# Altium PCB Placa_Control.PcbDoc
Units mm, origin at the board's own origin, x right, y up, seen from the top; angles counter-clockwise.
Board outline 100 x 70 mm, 2 copper layers (Top Layer, Bottom Layer), stack 1.571 mm thick; 36 components, 50 nets, 226 pads, 3 vias.
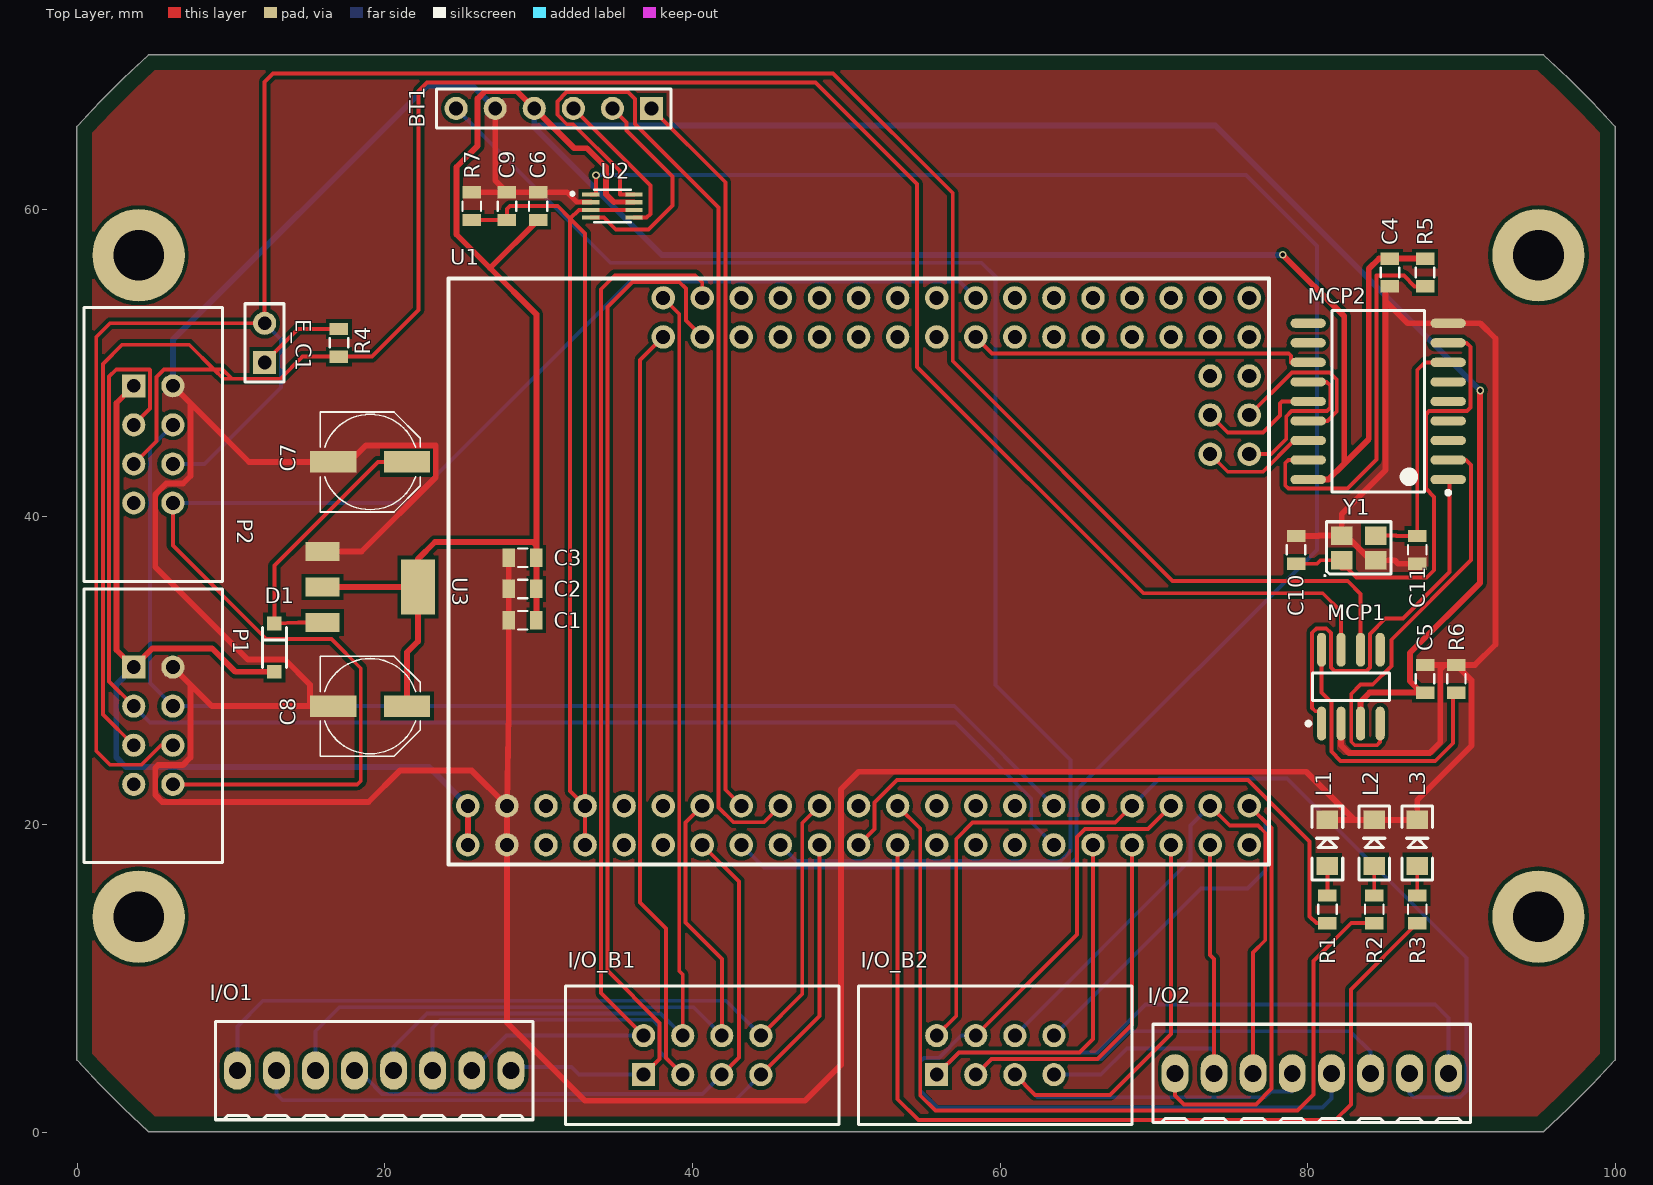
[diagram p0: Top Layer view]
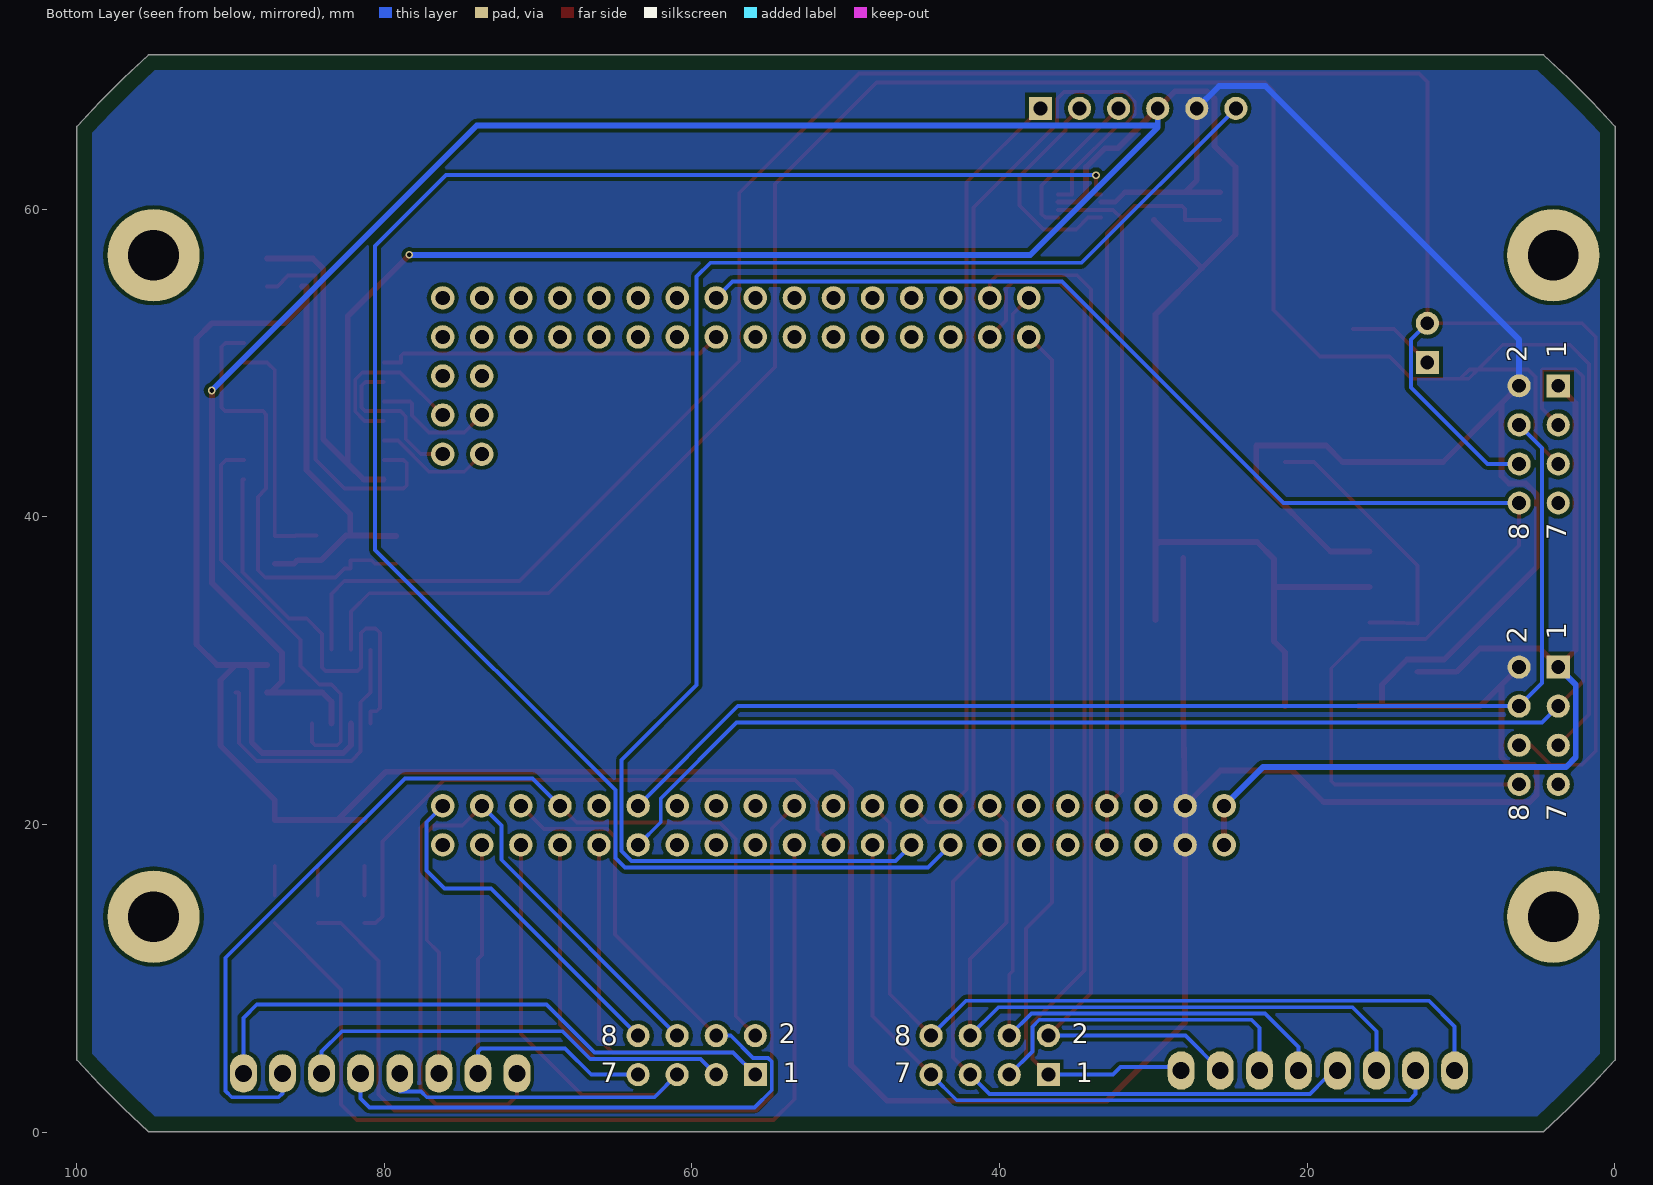
[diagram p1: Bottom Layer view, seen from below]
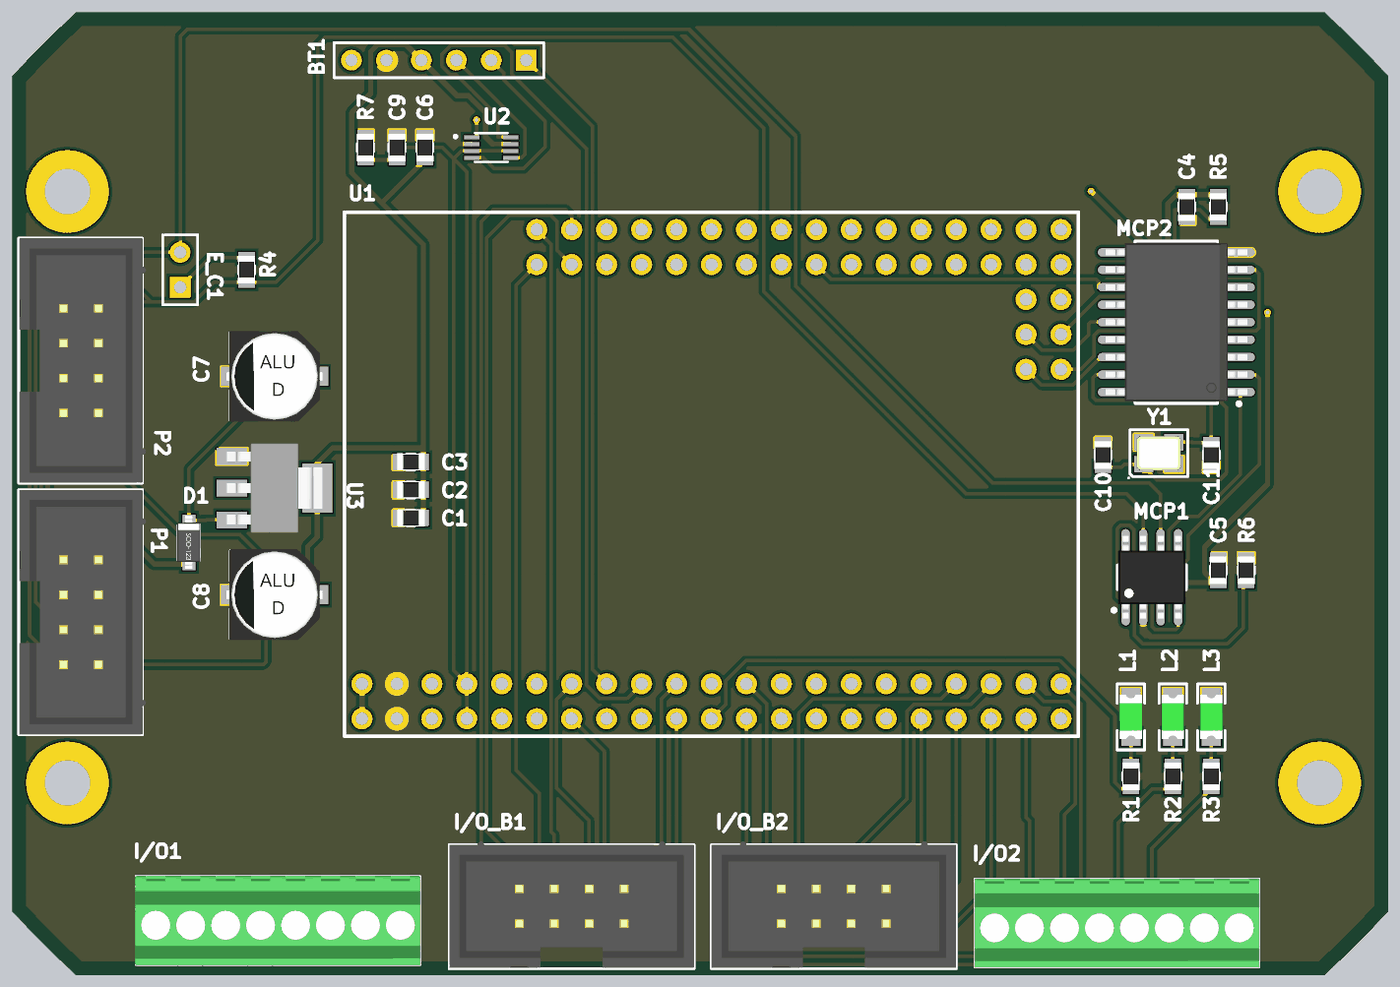
[diagram p2: 3D render of the assembled board from above, using the file's embedded part models]

## Layer stack, top to bottom
Top Solder: solder mask 0.0102, Solder Resist, Dk 3.5
Top Layer: signal copper 0.0356
Dielectric 1: dielectric 1.5, FR-4, Dk 4.8
Bottom Layer: signal copper 0.0356
Bottom Solder: solder mask 0.0102, Solder Resist, Dk 3.5

## Board outline
-0.016,49.637 -0.016,65.373 1.485,66.974 3.036,68.525 4.637,70.026 95.331,70.026 96.932,68.525 98.483,66.974 99.984,65.373 99.984,4.679 98.483,3.078 96.932,1.527 95.331,0.026 4.637,0.026 3.036,1.527 1.485,3.078 -0.016,4.679

## Design rules (kind name [scope] priority, off if disabled: settings)
BoardOutlineClearance [All] p1: gap=1 ignorepadtopadclearanceinfootprint=FALSE
Clearance Clearance_2 [InNamedPolygon('GND TOP PLANE')] p1: gap=0.254 ignorepadtopadclearanceinfootprint=FALSE except(0: Arc-Hole Track-Hole SMDPad-Hole THPad-Hole Via-Hole Fill-Hole Poly-Hole Region-Hole Text-Hole)
Clearance Clearance_1 [InNamedPolygon('GND BOTTOM PLANE')] p2: gap=0.254 ignorepadtopadclearanceinfootprint=FALSE except(0: Arc-Hole Track-Hole SMDPad-Hole THPad-Hole Via-Hole Fill-Hole Poly-Hole Region-Hole Text-Hole)
Clearance Clearance_JUMPER [InNet('GND') vs InNet('PGND')] p3: gap=0.05 ignorepadtopadclearanceinfootprint=FALSE
Clearance Clearance_POWER [InNet('24V') vs InNet('PGND')] p4: gap=0.381 ignorepadtopadclearanceinfootprint=FALSE
Clearance [All] p5: gap=0.152 ignorepadtopadclearanceinfootprint=FALSE
HoleSize [All] p1: absolutevalues=TRUE maxlimit=6.3 minlimit=0.3 maxpercent=80.000 minpercent=20.000
PlaneClearance [All] p1: clearance=5.016
PlaneConnect [All] p1: planeconnectstyle=Relief reliefexpansion=0.508 reliefentries=4 reliefconductorwidth=0.381 reliefairgap=-0.05
PolygonConnect [All] p1: connectstyle=Relief reliefconductorwidth=0.254 reliefentries=4 polygonreliefangle="90 Angle" airgapwidth=-0.05
RoutingVias RoutingVias_24V [InNet('24V')] p1: holewidth=0.5 width=0.8 viastyle="Through Hole" minholewidth=0.3 minwidth=0.6 maxholewidth=1 maxwidth=1.2
RoutingVias RoutingVias_PGND [InNet('PGND')] p2: holewidth=0.5 width=0.8 viastyle="Through Hole" minholewidth=0.3 minwidth=0.6 maxholewidth=1 maxwidth=1.2
RoutingVias RoutingVias_PGNDC [InNet('PGNDC')] p3: holewidth=0.5 width=0.8 viastyle="Through Hole" minholewidth=0.3 minwidth=0.6 maxholewidth=1 maxwidth=1.2
RoutingVias RoutingVias_MOTOR1 [InNet('MOTOR1')] p4: holewidth=0.5 width=0.8 viastyle="Through Hole" minholewidth=0.3 minwidth=0.6 maxholewidth=1 maxwidth=1.2
RoutingVias RoutingVias_MOTOR2 [InNet('MOTOR2')] p5: holewidth=0.5 width=0.8 viastyle="Through Hole" minholewidth=0.3 minwidth=0.6 maxholewidth=1 maxwidth=1.2
RoutingVias RoutingVias_C17_1 [InNet('NetC17_+')] p6: holewidth=0.5 width=0.8 viastyle="Through Hole" minholewidth=0.3 minwidth=0.6 maxholewidth=1 maxwidth=1.2
RoutingVias [All] p7: holewidth=0.3 width=0.5 viastyle="Through Hole" minholewidth=0.3 minwidth=0.6 maxholewidth=1 maxwidth=1.2
SMDNeckDown [All] p1: percent=120.000
SilkToSilkClearance [All] p1 off: silktosilkclearance=0.127
SolderMaskExpansion [All] p1: expansion=0.102
Width Width_Motor1 [InNet('MOTOR1')] p1: maxlimit=0.889 minlimit=0.7 preferedwidth=0.8
Width Width_Motor2 [InNet('MOTOR2')] p2: maxlimit=0.889 minlimit=0.7 preferedwidth=0.8
Width Width_24V [InNet('24V')] p3: maxlimit=0.889 minlimit=0.7 preferedwidth=0.8
Width Width_PGND [InNet('PGND')] p4: maxlimit=0.889 minlimit=0.6 preferedwidth=0.8
Width Width_PGNDC [InNet('PGNDC')] p5: maxlimit=0.889 minlimit=0.6 preferedwidth=0.8
Width Width_GND [InNet('GND')] p6: maxlimit=0.508 minlimit=0.254 preferedwidth=0.381 checkconnectedcopper=TRUE
Width Width_Vin [InNet('Vin')] p7: maxlimit=0.508 minlimit=0.254 preferedwidth=0.381 checkconnectedcopper=TRUE
Width Width_C17_1 [InNet('NetC17_+')] p8: maxlimit=0.508 minlimit=0.254 preferedwidth=0.381 checkconnectedcopper=TRUE
Width Width_5V [InNet('5V')] p9: maxlimit=0.381 minlimit=0.254 preferedwidth=0.381 checkconnectedcopper=TRUE
Width [All] p10: maxlimit=0.508 minlimit=0.254 preferedwidth=0.254
26 further rules are at their usual default settings.

## Components (designator, comment, footprint, x,y, rotation, side; value= is the part's Value field where it differs from the comment)
BT1 "Header 6" HDR1X6 37.338,66.548 r180 top
C1 "100n" 0805 28.956,33.274 r180 top
C2 "100n" 0805 28.956,35.306 r180 top
C3 "100n" 0805 28.956,37.338 r180 top
C4 "100n" 0805 85.344,55.88 r270 top
C5 "100n" 0805 87.63,29.464 r90 top
C6 "100n" 0805 29.972,60.198 r90 top
C7 "47u" PANASONIC_D 19.05,43.561 r0 top
C8 "47u" PANASONIC_D 19.05,27.686 r0 top
C9 "100n" 0805 27.94,60.198 r90 top
C10 "22p" 0805 79.248,37.846 r90 top
C11 "22p" 0805 87.122,37.846 r270 top
D1 "SOD123-1A" SOD-123 12.827,31.496 r270 top
E_C1 "Header 2" HDR1X2 12.192,50.038 r90 top
I/O1 "282834-8" "TE 282834-8" 19.304,4 r180 top
I/O2 "282834-8" "TE 282834-8" 80.264,3.81 r180 top
I/O_B1 "IDC2X4" IDC2X4 40.64,5 r0 top
I/O_B2 "IDC2X4" IDC2X4 59.69,5 r0 top
L1 "1206 LED" LED-1206 81.28,18.796 r90 top
L2 "1206 LED" LED-1206 84.328,18.796 r90 top
L3 "1206 LED" LED-1206 87.122,18.796 r90 top
MCP1 "MCP2551T-I/SN" SOIC-SN8_N 82.804,28.956 r90 top
MCP2 "MCP2515T-E/SO" SOIC-SO18_N 84.582,47.498 r180 top
P1 "IDC2X4" IDC2X4 4.953,26.416 r270 top
P2 "IDC2X4" IDC2X4 4.953,44.704 r270 top
R1 "560" 0805 81.28,14.478 r270 top
R2 "560" 0805 84.328,14.478 r270 top
R3 "560" 0805 87.122,14.478 r270 top
R4 "124" 0805 17.018,51.308 r90 top
R5 "10K" 0805 87.63,55.88 r90 top
R6 "4.7K" 0805 89.662,29.464 r270 top
R7 "10K" 0805 25.654,60.198 r270 top
U1 "RobotDyn Mega 2560 Pro" Mega2560Pro_Layout 24.13,17.272 r0 top
U2 "TXB0102" SOP50P310X90-8N 34.798,60.198 r0 top
U3 "NCP1117" SOT223 19.05,35.433 r270 top
Y1 "16MHz" "NDK NX3225SA" 83.312,37.973 r0 top

## Footprints (in the part's own frame and the unit in brackets; to place one, negate y for a bottom-side part, rotate by r counter-clockwise, add the part's x,y. Pads: shape width x height; smd on the part's side, far side on the other; paste and mask are expansions set on the pad)
0805 [mil]
  rect 31.5x47.24 smd: 1(-35.43,0) 2(35.43,0)
  silkscreen extent -12,-24 12,24, body extent -39,-25 39,25, height 20
HDR1X2 [mm] "Connector; Header; 2 Position"
  rect 1.5x1.5 hole 0.9: 1(0,0)
  round 1.5 hole 0.9: 2(2.54,0)
  silkscreen extent -1.27,-1.27 3.81,1.27
HDR1X6 [mm] "Connector; Header; 6 Position"
  rect 1.5x1.5 hole 0.9: 1(0,0)
  round 1.5 hole 0.9: 2(2.54,0) 3(5.08,0) 4(7.62,0) 5(10.16,0) 6(12.7,0)
  silkscreen extent -1.27,-1.27 13.97,1.27
IDC2X4 [mm] "IDC Connector 2x4"
  rect 1.5x1.5 hole 0.9: 1(-3.81,-1.27)
  round 1.5 hole 0.9: 2(-3.81,1.27) 3(-1.27,-1.27) 4(-1.27,1.27) 5(1.27,-1.27) 6(1.27,1.27) 7(3.81,-1.27) 8(3.81,1.27)
  silkscreen extent -8.9,-4.5 8.9,4.5, body extent -8.89,-4.44 8.89,4.76, height 9.01
LED-1206 [mm]
  rect 1.2x1.4 smd: A(-1.5,0) C(1.5,0)
  silkscreen extent -2.4,-1 2.4,1, body extent -1.6,-0.8 1.6,0.8, height 1.11
Mega2560Pro_Layout [mil]
  round 60 hole 36: 0(550,155) 1(550,55) 2(650,155) 3(650,55) 3V3@0(350,155) 3V3@1(350,55) 4(750,155) 5(750,55) 5V@0(250,155) 5V@1(250,55) 6(850,155) 7(850,55) 8(950,155) 9(950,55) 10(1050,155) 11(1050,55) 12(1150,155) 13(1150,55) 14(1250,155) 15(1250,55) 16(1350,155) 17(1350,55) 18(1450,155) 19(1450,55) 20(1550,155) 21(1550,55) 22(1650,155) 23(1650,55) 24(1750,155) 25(1750,55) 26(1850,155) 27(1850,55) 28(1950,155) 29(1950,55) 30(2050,155) 31(2050,55) 32(1350,1455) 33(1350,1355) 34(1450,1455) 35(1450,1355) 36(1550,1455) 37(1550,1355) 38(1650,1455) 39(1650,1355) 40(1750,1455) 41(1750,1355) 42(1850,1455) 43(1850,1355) 44(1950,1455) 45(1950,1355) 46(2050,1455) 47(2050,1355) 48(2050,1255) 49(1950,1255) 50(2050,1155) 51(1950,1155) 52(2050,1055) 53(1950,1055) A0(550,1455) A1(550,1355) A2(650,1455) A3(650,1355) A4(750,1455) A5(750,1355) A6(850,1455) A7(850,1355) A8(950,1455) A9(950,1355) A10(1050,1455) A11(1050,1355) A12(1150,1455) A13(1150,1355) A14(1250,1455) A15(1250,1355) AREF(450,155) GND@0(150,155) GND@1(150,55) RESET(450,55) VIN@0(50,155) VIN@1(50,55)
  silkscreen extent 0,5 2100,1505
"NDK NX3225SA" [mm] "Crystal, 4-Leads, Body 2.50x3.20mm, Pitch 2.20mm, IPC Medium Density"
  rect 1.4x1.2 smd: 1(-1.1,-0.8) 2(1.1,-0.8) 3(1.1,0.8) 4(-1.1,0.8)
  silkscreen extent -2.25,-1.85 2.1,1.7, body extent -1.61,-1.26 1.61,1.26, height 0.6
PANASONIC_D [mm]
  rect 3x1.4 smd: +(2.4,0) -(-2.4,0)
  silkscreen extent -3.25,-3.25 3.25,3.25, body extent -3.5,-3.3 3.5,3.3, height 5.4
SOD-123 [mm]
  rect 0.9x0.95 smd: A(1.575,0) C(-1.575,0)
  silkscreen extent -1.3,-0.77 1.3,0.77, body extent -1.93,-0.86 1.92,0.84, height 1.46
SOIC-SN8_N [mm] "SOIC, 8-Leads, Body 4.9x3.8mm, Pitch 1.27mm, IPC Medium Density"
  oval 2.2x0.6 smd: 1(-2.4,1.905) 2(-2.4,0.635) 3(-2.4,-0.635) 4(-2.4,-1.905) 5(2.4,-1.905) 6(2.4,-0.635) 7(2.4,0.635) 8(2.4,1.905)
  silkscreen extent -2.52,-2.5 0.9,2.88, body extent -3,-2.45 3,2.45, height 1.75
SOIC-SO18_N [mm] "SOIC, 18-Leads, Body 11.5x7.5mm, Pitch 1.27mm, IPC Medium Density"
  oval 2.3x0.6 smd: 1(-4.55,5.08) 2(-4.55,3.81) 3(-4.55,2.54) 4(-4.55,1.27) 5(-4.55,0) 6(-4.55,-1.27) 7(-4.55,-2.54) 8(-4.55,-3.81) 9(-4.55,-5.08) 10(4.55,-5.08) 11(4.55,-3.81) 12(4.55,-2.54) 13(4.55,-1.27) 14(4.55,0) 15(4.55,1.27) 16(4.55,2.54) 17(4.55,3.81) 18(4.55,5.08)
  silkscreen extent -4.67,-5.9 3,6.05, body extent -5.15,-5.77 5.15,5.76, height 2.65
SOP50P310X90-8N [mm]
  rect 1.12x0.27 smd: 1(-1.405,0.75) 2(-1.405,0.25) 3(-1.405,-0.25) 4(-1.405,-0.75) 5(1.405,-0.75) 6(1.405,-0.25) 7(1.405,0.25) 8(1.405,0.75)
  silkscreen extent -2.7,-1.05 1.2,1.05
SOT223 [mil]
  rect 48x88 smd: 1(-91,-122) 2(0,-122) 3(91,-122)
  rect 141.73x86.61 smd: 4(0,122.01)
  body extent -128,-136 128,136, height 63
"TE 282834-8" [mm]
  oval 1.75x2.5 hole 1.1: 1(-8.89,0) 2(-6.35,0) 3(-3.81,0) 4(-1.27,0) 5(1.27,0) 6(3.81,0) 7(6.35,0) 8(8.89,0)
  silkscreen extent -10.32,-3.2 10.32,3.2, body extent -10.39,-3.25 10.39,3.25, height 10

## Part data
BT1: "Header, 6-Pin", LatestRevisionDate=17-Jul-2002, LatestRevisionNote="Re-released for DXP Platform.", Publisher="Altium Limited"
C1 C2 C3 C4 C5 C6 C9 C10 C11: library part CAP0805
C7 C8: library part 47UF-50V-20%(ELECT), PROD_ID=CAP-10547
D1: library part DIODESOD123
E_C1: "Header, 2-Pin", LatestRevisionDate=17-Jul-2002, LatestRevisionNote="Re-released for DXP Platform.", Publisher="Altium Limited"
I/O1 I/O2: "TERM BLOCK 8POS SIDE ENT 2.54MM", Colour=Green, Manufacturer="TE Connectivity AMP Connectors", Supplier Part Number 1=A98338-ND, TemperatureRange="-40C ~ 105C", Voltage=150V, ComponentLink1Description=Datasheet, ComponentLink1URL=http://www.te.com/commerce/DocumentDelivery/DDEController?Action=srchrtrv&DocNm=282834&DocType=Customer+Drawing&DocLang=English, ComponentLink2Description="Digi-Key Listing", ComponentLink2URL=http://www.digikey.ca/product-detail/en/282834-8/A98338-ND/1150136, Number Of Levels=1, Orientation="Horizontal with Board", PartId=9295, Part Number=282834-8, Pitch="0.100\" (2.54mm)", Positions Per Level=8, Price=8,41, Supplier 1=Digi-Key
I/O_B1 I/O_B2 P1 P2: "Header, 4-Pin, Dual row", LatestRevisionDate=17-Jul-2002, LatestRevisionNote="Re-released for DXP Platform.", Publisher="Altium Limited"
L1 L2 L3: library part LED1206
MCP1: "High-Speed CAN Transceiver, 8-Pin SOIC, Industrial Temperature, Tape and Reel", Supplier Part Number 1=MCP2551T-I/SNTR-ND, Code_IPC=SOIC127P600-8, Code_JEDEC=MS-012, ComponentLink1Description=Datasheet, ComponentLink1URL=http://ww1.microchip.com/downloads/en/DeviceDoc/21667E.pdf, ComponentLink2Description="Packaging Specification", ComponentLink2URL=http://www.microchip.com/stellent/groups/techpub_sg/documents/packagingspec/en012702.pdf, ComponentLink3Description="Microchip.com Home", ComponentLink3URL=http://www.microchip.com/, DatasheetVersion="revE, Jan-2007", PackageDescription="8-Lead Plastic Small Outline (SN) - Narrow, 3.90mm Body [SOIC]", PackageReference=SOIC-SN8, PackageVersion="revBB, Aug-2009", Published=29-Jan-2009, Publisher="Altium Limited", Supplier 1=Digi-Key, Supplier 2=Farnell, Supplier Part Number 2=1788569
MCP2: "Stand-Alone CAN Controller With SPI Interface, 18-Pin SOIC, Extended Temperature, Tape and Reel", Supplier Part Number 1=MCP2515T-E/SO-ND, Code_JEDEC=MS-013, ComponentLink1Description=Datasheet, ComponentLink1URL=http://ww1.microchip.com/downloads/en/DeviceDoc/21801e.pdf, ComponentLink2Description="Packaging Specification", ComponentLink2URL=http://www.microchip.com/stellent/groups/techpub_sg/documents/packagingspec/en012702.pdf, ComponentLink3Description="Microchip.com Home", ComponentLink3URL=http://www.microchip.com/, DatasheetVersion="revE, Nov-2007", PackageDescription="18-Lead Plastic Small Outline (SO) - Wide 7.50mm Body [SOIC]", PackageReference=SOIC-SO18, PackageVersion="revBB, Aug-2009", Published=29-Jan-2009, Publisher="Altium Limited", Supplier 1=Digi-Key
R1 R2 R3 R4 R5 R6 R7: library part RESISTOR0805-RES
U1: BOM_Manufacturer Part=?, spicePre=U
U2: "2-Bit Bidirectional Voltage-Level Translator with Auto Direction Sensing and +/-15-kV ESD Protect", Package=None, Availability=Unavailable, MF="Texas Instruments", MP=TXB0102, Price=None, SnapEDA_Link=https://www.snapeda.com/parts/TXB0102/Texas%20Instruments/view-part/?ref=snap
U3: library part V_REG_LM1117SOT223, PROD_ID=VREG-08170
Y1: library part NX3225SA-16.000MHZ-STD-CSR-1, "CRYSTAL 16.0000MHZ 8PF SMD", Device Package="4-SMD, No Lead (DFN, LCC)", Frequency Stability=15ppm, Load Capacitance=8pF, Manufacturer=NDK, Operating Mode=Fundamental, Supplier Part Number 1=644-1049-2-ND, ComponentLink1Description=Datasheet, ComponentLink1URL=http://media.digikey.com/pdf/Data%20Sheets/NDK%20PDFs/NX3225SA.pdf, ComponentLink2Description="Digi-Key Listing", ComponentLink2URL=http://www.digikey.com/product-detail/en/NX3225SA-16.000MHZ-STD-CSR-1/644-1049-2-ND/1128831, ESR="80 Ohm", Frequency=16MHz, Frequency Tolerance=15ppm, PartId=8509, Part Number=NX3225SA-16.000MHZ-STD-CSR-1, Price=0,3799, Supplier 1=Digi-Key, Type="MHz Crystal"

## Free pads (board coordinates)
  round 6 hole 3.3: 7(4,14) 8(95,14) 9(4,57) 10(95,57)

## Via types
v1: diameter 0.5, hole 0.3, Top Layer to Bottom Layer, 3 vias

## Nets (pads, with @x,y where several pads share a name; then routed paths per layer and width w, separated by ;. In a path a pad name is that pad's centre, name@x,y a point inside that pad or via, vN(x,y) a via of type N, cw(c..) or ccw(c..) an arc to the next point about the centre after c; other vN are vias at no path point)
3.3V: C9.1 R7.2 U1.3V3@0 U1.3V3@1 U2.3 U2.6 | length 91.6
  Top Layer w0.254: R7.2 C9.1 27.94,59.995 28.143,60.198 31.242,60.198 32.054,59.386 ; 33.02,18.669 33.02,21.209 ; U2.6 U2.3 32.614,59.948 32.054,59.389 32.054,59.386 ; 32.054,59.386 32.054,22.175 33.02,21.209 ; 32.054,59.386 33.02,58.42 33.02,21.209
5V: BT1.4 C1.1 C2.1 C3.1 C4.1 C5.1 C6.1 C8.+ MCP1.3 MCP2.18 R5.2 U2.7 U3.2 U3.4 | length 264.7
  Top Layer w0.324: 34.9,60.448 U2.7
  Top Layer w0.381: U3.2 U3.4 ; C8.+ 21.45,31.191 22.149,31.89 U3.4 ; C1.1 C2.1 C3.1 29.856,38.151 ; C6.1 26.846,56.172 ; 34.9,60.448 34.378,60.97 34.378,62.727 33.147,63.957 32.309,63.957 BT1.4 28.6,67.666 26.518,67.666 26.035,67.183 26.035,64.11 24.663,62.738 24.663,58.355 26.846,56.172 ; v1(78.384,57.023) 82.372,53.035 82.372,43.447 ; MCP2.18 81.343,42.418 82.372,43.447 ; MCP1.3 83.439,27.991 84.012,28.564 C5.1@87.401,28.564 ; C5.1 C5.1@87.401,28.564 ; R5.2 C4.1 84.633,56.78 83.972,56.12 83.972,45.048 82.372,43.447 ; v1(91.211,48.209) 91.211,35.712 86.639,31.14 86.639,29.326 C5.1@87.401,28.564 ; U3.4 22.149,37.237 23.266,38.354 29.653,38.354 29.856,38.151 ; 26.846,56.172 29.856,53.162 29.856,38.151
  Bottom Layer w0.381: BT1.4 29.718,65.43 ; v1(78.384,57.023) 38.007,57.023 29.718,65.312 29.718,65.43 ; v1(91.211,48.209) 73.99,65.43 29.718,65.43
Aux_1: I/O1.1 I/O_B1.1 U1.A3 | length 70.4
  Top Layer w0.254: I/O_B1.1 37.859,4.759 37.859,7.099 34.468,10.49 34.468,53.645 36.093,55.27 39.141,55.27 39.573,54.839 39.573,52.756 U1.A3
  Bottom Layer w0.254: I/O1.1 28.194,4.219 32.141,4.219 32.63,3.73 I/O_B1.1
Aux_2: I/O1.2 I/O_B1.2 U1.A2 | length 69.9
  Top Layer w0.254: I/O_B1.2 34.061,9.039 34.061,54.787 34.976,55.702 40.157,55.702 40.64,55.22 U1.A2
  Bottom Layer w0.254: I/O1.2 27.924,6.27 I/O_B1.2
Aux_3: I/O1.3 I/O_B1.3 U1.A1 | length 71.4
  Top Layer w0.254: U1.A1 36.601,50.19 36.601,14.91 38.278,13.233 38.278,4.822 I/O_B1.3
  Bottom Layer w0.254: I/O1.3 23.114,6.782 23.631,7.299 37.418,7.299 37.871,6.846 37.871,5.229 I/O_B1.3
Aux_4: I/O1.4 I/O_B1.4 U1.A0 | length 70.3
  Top Layer w0.254: U1.A0 39.141,53.188 39.141,10.465 39.37,10.236 I/O_B1.4
  Bottom Layer w0.254: I/O1.4 20.574,5.537 22.742,7.705 37.935,7.705 I/O_B1.4
Aux_5: I/O1.5 I/O_B1.5 U1.3 | length 41.7
  Top Layer w0.254: U1.3 43.028,16.281 43.028,4.848 I/O_B1.5
  Bottom Layer w0.254: I/O1.5 18.034,3.505 18.796,3.505 19.83,2.471 40.651,2.471 I/O_B1.5
Aux_6: I/O1.6 I/O_B1.6 U1.2 | length 46.7
  Top Layer w0.254: U1.2 39.548,20.117 39.548,13.614 41.91,11.252 I/O_B1.6
  Bottom Layer w0.254: I/O1.6 15.494,6.553 17.052,8.111 40.069,8.111 I/O_B1.6
Aux_7: I/O1.7 I/O_B1.7 U1.9 | length 50.4
  Top Layer w0.254: I/O_B1.7 48.26,7.54 U1.9
  Bottom Layer w0.254: I/O1.7 12.954,2.464 13.353,2.065 42.785,2.065 I/O_B1.7
Aux_8: I/O1.8 I/O_B1.8 U1.8 | length 55
  Top Layer w0.254: I/O_B1.8 47.142,8.962 47.142,20.091 U1.8
  Bottom Layer w0.254: I/O1.8 10.414,6.858 12.09,8.534 42.186,8.534 I/O_B1.8
Aux_9: I/O2.1 I/O_B2.1 U1.23 | length 62.9
  Top Layer w0.254: I/O_B2.1 57.332,5.182 65.176,5.182 66.04,6.045 U1.23
  Bottom Layer w0.254: I/O_B2.1 57.332,5.182 66.345,5.182 69.444,8.28 88.29,8.28 89.154,7.417 I/O2.1
Aux_10: I/O2.2 I/O_B2.2 U1.24 | length 66.9
  Top Layer w0.254: I/O_B2.2 57.15,7.54 57.15,19.05 58.216,20.116 67.487,20.116 U1.24
  Bottom Layer w0.254: U1.24 70.358,22.987 78.664,22.987 90.322,11.328 90.322,2.667 89.916,2.261 86.868,2.261 86.614,2.515 I/O2.2
Aux_11: I/O2.3 I/O_B2.3 U1.25 | length 52
  Top Layer w0.254: I/O_B2.3 59.449,4.759 66.345,4.759 68.58,6.994 U1.25
  Bottom Layer w0.254: I/O_B2.3 59.449,4.759 66.608,4.759 68.402,6.553 82.753,6.553 84.074,5.232 I/O2.3
Aux_12: I/O2.4 I/O_B2.4 U1.26 | length 57.8
  Top Layer w0.254: I/O_B2.4 64.999,12.849 64.999,19.177 65.532,19.71 69.621,19.71 U1.26
  Bottom Layer w0.254: I/O_B2.4 57.476,6.27 56.032,4.826 55.042,4.826 54.813,4.597 54.813,2.718 55.931,1.6 80.95,1.6 81.534,2.184 I/O2.4
Aux_13: I/O2.5 I/O_B2.5 U1.27 | length 44.6
  Top Layer w0.254: I/O_B2.5 62.277,2.413 67.158,2.413 71.12,6.375 U1.27
  Bottom Layer w0.254: I/O_B2.5 62.429,2.261 77.241,2.261 77.622,2.642 78.994,2.642 I/O2.5
Aux_14: I/O2.6 I/O_B2.6 U1.28 | length 40.5
  Top Layer w0.254: U1.28 74.93,19.939 76.759,19.939 77.241,19.456 77.241,12.471 76.454,11.684 I/O2.6
  Bottom Layer w0.254: I/O_B2.6 72.39,17.7 72.39,19.939 U1.28
Aux_15: I/O2.7 I/O_B2.7 U1.29 | length 27.6
  Top Layer w0.254: U1.29 73.66,11.506 73.914,11.252 I/O2.7
  Bottom Layer w0.254: I/O_B2.7 66.548,3.73 68.254,5.436 73.711,5.436 73.914,5.232 I/O2.7
Aux_16: I/O2.8 I/O_B2.8 U1.30 | length 50.2
  Top Layer w0.254: I/O2.8 71.374,2.388 71.958,1.803 76.632,1.803 77.648,2.819 77.648,19.761 U1.30
  Bottom Layer w0.254: I/O_B2.8 73.054,15.824 76.098,15.824 77.267,16.993 77.267,20.142 U1.30
BT_EN: BT1.6 U1.7 | length 98.5
  Bottom Layer w0.254: BT1.6 34.671,56.515 58.801,56.515 59.69,55.626 59.69,29.058 64.567,24.181 64.567,18.263 63.932,17.628 46.761,17.628 U1.7
BT_RX_3.3: BT1.2 U2.4 | length 14.2
  Top Layer w0.254: U2.4 34.239,59.448 35.013,58.674 37.144,58.674 38.71,60.24 38.71,62.12 35.717,65.113 35.717,65.629 BT1.2
BT_RX_5: U1.5 U2.1 | length 119.3
  Top Layer w0.254: U2.1 33.731,60.948 v1(33.731,62.205)
  Bottom Layer w0.254: v1(33.731,62.205) 75.997,62.205 80.594,57.607 80.594,37.846 64.973,22.225 64.973,17.805 64.364,17.196 44.653,17.196 U1.5
BT_STATE: BT1.1 U1.4 | length 47.8
  Top Layer w0.254: BT1.1 42.139,61.747 42.139,22.25 U1.4
BT_TX_3.3: BT1.3 U2.5 | length 10.1
  Top Layer w0.254: BT1.3 37.262,61.544 37.262,59.69 37.02,59.448 U2.5
BT_TX_5: U1.6 U2.8 | length 67.6
  Top Layer w0.254: U2.8 35.281,60.948 35.281,62.488 32.249,65.519 31.832,65.519 31.217,66.134 31.217,67.005 31.826,67.615 35.814,67.615 36.271,67.158 36.271,65.544 41.707,60.109 41.707,21.107 42.672,20.142 44.653,20.142 U1.6
C_CS: MCP2.16 U1.53 | length 7.7
  Top Layer w0.254: U1.53 74.803,42.926 77.089,42.926 79.121,44.958 MCP2.16
CANH: MCP1.7 P1.5 P2.5 R4.1 | length 159.2
  Top Layer w0.254: P1.5 1.676,27.153 1.676,49.936 2.921,51.181 7.29,51.181 8.89,49.581 ; P2.5 5.156,44.907 5.156,49.098 5.639,49.581 8.89,49.581 ; MCP1.7 82.169,33.833 80.975,35.027 69.317,35.027 54.61,49.733 54.61,61.62 48.006,68.224 22.733,68.224 22.2,67.691 22.2,53.442 19.166,50.408 R4.1 14.645,50.408 13.208,48.971 10.058,48.971 ; 8.89,49.581 9.5,48.971 10.058,48.971 ; 8.89,49.581 9.449,49.581 10.058,48.971
CANL: E_C1.2 MCP1.6 P1.6 P2.6 | length 169
  Top Layer w0.254: P1.6 5.461,25.146 4.191,23.876 2.134,23.876 1.245,24.765 1.245,51.689 2.134,52.578 E_C1.2 12.192,68.275 12.725,68.809 49.149,68.809 56.921,61.036 56.921,50.114 71.222,35.814 82.601,35.814 83.439,34.976 MCP1.6
  Bottom Layer w0.254: P2.6 8.28,43.434 13.259,48.412 13.259,51.511 E_C1.2
CTAL1: C10.1 MCP2.8 Y1.1 | length 29
  Top Layer w0.254: C10.1 80.594,36.946 80.821,37.173 Y1.1@82.194,37.173 ; Y1.1 Y1.1@82.194,37.173 ; MCP2.8 90.322,51.308 90.576,51.054 90.576,47.092 90.348,46.863 87.884,46.863 87.681,46.66 87.681,41.834 88.222,41.292 88.222,36.525 87.74,36.043 83.16,36.043 82.575,36.627 82.194,36.627 Y1.1@82.194,37.173
CTAL2: C11.1 MCP2.7 Y1.3 | length 15.7
  Top Layer w0.254: Y1.3 85.75,38.773 85.777,38.746 C11.1 87.122,49.53 87.63,50.038 MCP2.7
GND: BT1.5 C1.2 C2.2 C3.2 C4.2 C5.2 C6.2 C7.- C8.- C9.2 C10.2 C11.2 L1.C L2.C L3.C MCP1.2 MCP2.9 P1.2 P2.2 R6.1 R7.1 U1.GND@0 U1.GND@1 U2.2 U3.1 Y1.2 Y1.4 | length 347.2
  Top Layer w0.324: 31.852,61.098 32.502,60.448 U2.2
  Top Layer w0.381: P1.2 7.366,29.083 ; P2.2 7.366,47.371 ; U3.1 18.491,37.744 23.317,42.57 23.317,44.628 18.771,44.628 17.704,43.561 C7.- 11.176,43.561 7.366,47.371 ; C8.- 15.138,27.686 ; R7.1 C9.2 ; BT1.5 27.178,61.86 C9.2 ; C3.2 C2.2 C1.2 28.056,27.345 27.94,21.209 ; 31.852,61.098 C6.2 C9.2 ; C10.2 80.696,38.746 80.723,38.773 Y1.4 ; L1.C 83.031,20.296 ; MCP1.2 82.169,25.146 82.677,24.638 87.935,24.638 88.621,25.324 88.621,30.085 88.9,30.364 ; C4.2 85.065,54.98 85.065,54 ; C11.2 85.876,36.946 85.649,37.173 Y1.2 84.099,37.173 82.499,38.773 Y1.4 ; C5.2 88.9,30.364 ; 7.366,29.083 8.763,27.686 15.138,27.686 ; 7.366,29.083 7.366,24.359 6.858,23.851 5.258,23.851 5.08,23.673 5.08,21.92 5.537,21.463 18.948,21.463 20.98,23.495 25.654,23.495 27.94,21.209 ; 7.366,47.371 7.366,42.647 6.883,42.164 5.791,42.164 5.08,41.453 5.08,36.733 11.1,30.713 13.508,30.713 15.138,29.083 15.138,27.686 ; 27.94,21.209 27.94,18.669 27.94,7.112 33.02,2.032 47.32,2.032 49.657,4.369 49.657,22.276 50.8,23.419 79.908,23.419 83.031,20.296 ; Y1.4 82.212,40.183 85.065,43.035 85.065,54 ; 83.031,20.296 83.361,20.296 L2.C L3.C 87.122,21.59 90.653,25.121 90.653,29.373 R6.1 ; 85.065,54 86.487,52.578 MCP2.9 91.211,52.578 92.202,51.587 92.202,31.699 90.867,30.364 R6.1 ; 88.9,30.364 R6.1
  Bottom Layer w0.381: P2.2 6.223,51.511 22.708,67.996 25.73,67.996 BT1.5
INT: MCP2.12 U1.33 | length 22.5
  Top Layer w0.254: U1.33 59.487,50.622 78.765,50.622 78.918,50.47 78.918,50.038 MCP2.12
LED1: R3.2 U1.13 | length 60.5
  Top Layer w0.254: U1.13 53.34,2.134 54.686,0.787 81.788,0.787 82.804,1.803 82.804,9.26 R3.2
LED2: R2.2 U1.12 | length 59.5
  Top Layer w0.254: U1.12 54.813,19.736 54.813,2.388 55.804,1.397 79.324,1.397 80.366,2.438 80.366,11.114 82.829,13.578 R2.2
LED3: R1.2 U1.11 | length 39.9
  Top Layer w0.254: U1.11 51.841,19.71 51.841,21.425 53.302,22.885 76.124,22.885 80.123,18.887 80.123,14.024 80.569,13.578 R1.2
MISO: MCP2.15 U1.50 | length 11.2
  Top Layer w0.254: U1.50 78.969,49.378 81.432,49.378 81.889,48.92 81.889,46.837 81.28,46.228 MCP2.15
MOSI: MCP2.14 U1.51 | length 8.1
  Top Layer w0.254: U1.51 74.803,45.466 77.089,45.466 78.197,46.574 78.197,47.356 78.339,47.498 MCP2.14
NetC7_+: C7.+ D1.C U3.3 | length 18.3
  Top Layer w0.254: U3.3 14.402,33.122 D1.C 12.827,36.83 19.558,43.561 C7.+
NetE_C1_1: E_C1.1 R4.2 | length 5.7
  Top Layer w0.254: E_C1.1 14.362,52.208 R4.2
NetL1_A: L1.A R1.1 | length 1.9
  Top Layer w0.254: R1.1 L1.A
NetL2_A: L2.A R2.1 | length 1.9
  Top Layer w0.254: R2.1 L2.A
NetL3_A: L3.A R3.1 | length 1.9
  Top Layer w0.254: R3.1 L3.A
NetMCP1_1: MCP1.1 MCP2.1 | length 28
  Top Layer w0.254: MCP1.1 80.899,27.356 80.493,27.356 80.289,27.559 80.289,32.461 80.569,32.741 81.204,32.741 81.509,32.436 81.509,30.201 81.737,29.972 83.82,29.972 84.049,30.201 84.049,32.385 85.039,33.376 86.208,33.376 89.23,36.398 89.23,42.418 MCP2.1
NetMCP1_4: MCP1.4 MCP2.2 | length 26.6
  Top Layer w0.254: MCP1.4 84.709,25.349 84.506,25.146 83.058,25.146 82.829,25.375 82.829,28.473 83.439,29.083 84.226,29.083 85.435,30.291 85.435,32.003 90.627,37.196 90.627,43.358 90.297,43.688 MCP2.2
NetMCP1_8: MCP1.8 R6.2 | length 19
  Top Layer w0.254: MCP1.8 80.899,28.575 81.534,27.94 81.534,24.74 82.144,24.13 88.29,24.13 89.433,25.273 89.433,28.539 89.459,28.564 R6.2
NetMCP2_17: MCP2.17 R5.1 | length 25.2
  Top Layer w0.254: MCP2.17 78.74,43.688 78.537,43.485 78.537,42.042 78.745,41.834 82.575,41.834 84.465,43.723 84.465,55.677 86.258,55.677 86.955,54.98 R5.1
SCK: MCP2.13 U1.52 | length 10.4
  Top Layer w0.254: U1.52 77.63,44.069 78.603,45.042 78.603,46.523 78.943,46.863 81.255,46.863 81.483,47.092 81.483,48.514 81.229,48.768 MCP2.13
SCL: P1.3 P2.3 U1.21 | length 93.4
  Top Layer w0.254: P1.3 2.083,29.286 2.083,49.124 2.54,49.581 4.699,49.581 4.75,49.53 4.75,47.041 P2.3
  Bottom Layer w0.254: P1.3 4.75,26.619 57.099,26.619 62.027,21.692 62.027,20.142 U1.21
SDA: P1.4 P2.4 U1.20 | length 79.5
  Bottom Layer w0.254: P2.4 4.724,44.475 4.724,29.185 P1.4 57.023,27.686 U1.20
SOS: P1.8 P2.8 U1.32 | length 96.5
  Top Layer w0.254: P1.8 18.212,22.606 18.44,22.835 18.44,30.15 16.535,32.055 12.294,32.055 6.223,38.125 P2.8
  Bottom Layer w0.254: P2.8 21.539,40.894 35.941,55.296 57.353,55.296 U1.32
Vin: D1.A P1.1 P2.1 U1.VIN@0 U1.VIN@1 | length 62.5
  Top Layer w0.381: P2.1 2.565,47.396 2.565,31.344 P1.1 4.902,31.445 8.763,31.445 10.287,29.921 D1.A ; 25.4,18.669 25.4,21.209
  Bottom Layer w0.381: P1.1 2.54,29.083 2.54,24.359 3.175,23.724 22.885,23.724 25.4,21.209
pads on no net: MCP1.5 MCP2.3 MCP2.4 MCP2.5 MCP2.6 MCP2.10 MCP2.11 P1.7 P2.7 U1.0 U1.1 U1.5V@0 U1.5V@1 U1.10 U1.14 U1.15 U1.16 U1.17 U1.18 U1.19 U1.22 U1.31 U1.34 U1.35 U1.36 U1.37 U1.38 U1.39 U1.40 U1.41 U1.42 U1.43 U1.44 U1.45 U1.46 U1.47 U1.48 U1.49 U1.A4 U1.A5 U1.A6 U1.A7 U1.A8 U1.A9 U1.A10 U1.A11 U1.A12 U1.A13 U1.A14 U1.A15 U1.AREF U1.RESET

## Polygon pours and split planes (outlines as drawn)
GND on Top Layer "GND TOP PLANE" (solid, pour order 6): -10.16,77.978 -9.398,78.74 108.204,78.74 108.204,-2.54 102.362,-8.382 100.584,-6.604 -14.732,-6.604
GND on Bottom Layer "GND BOTTOM PLANE" (solid, pour order 8): -7.112,76.454 115.062,76.454 117.094,74.422 107.442,64.77 107.442,-11.176 -12.192,-11.176 -17.272,-6.096

## Silkscreen, mask and mechanical layers (free items; w line width, h text height)
Mechanical 2:
  lines w0.2: -0.016,4.679 -0.016,49.637 -0.016,59.899 -0.016,63.291 -0.016,64.707 -0.016,65.129 -0.016,65.297 -0.016,65.345 -0.016,65.373 1.485,66.974 3.036,68.525 4.637,70.026 95.331,70.026 96.932,68.525 98.483,66.974 99.984,65.373 99.984,65.345 99.984,4.679 98.483,3.078 96.932,1.527 95.331,0.026 95.321,0.026 50.803,0.026 22.11,0.026 11.508,0.026 6.877,0.026 5.465,0.026 4.897,0.026 4.732,0.026 4.667,0.026 4.637,0.026 3.036,1.527 1.485,3.078 -0.016,4.679

## Text inside footprints (layer, text, board x,y; h text height)
I/O_B1: Bottom Overlay "1" at 35.052,3.222 h1.27; Bottom Overlay "2" at 35.306,5.762 h1.27; Bottom Overlay "7" at 46.863,3.222 h1.27; Bottom Overlay "8" at 46.863,5.635 h1.27
I/O_B2: Bottom Overlay "1" at 54.102,3.222 h1.27; Bottom Overlay "2" at 54.356,5.762 h1.27; Bottom Overlay "7" at 65.913,3.222 h1.27; Bottom Overlay "8" at 65.913,5.635 h1.27
P1: Bottom Overlay "1" at 3.175,32.004 h1.27 r270; Bottom Overlay "2" at 5.715,31.75 h1.27 r270; Bottom Overlay "7" at 3.175,20.193 h1.27 r270; Bottom Overlay "8" at 5.588,20.193 h1.27 r270
P2: Bottom Overlay "1" at 3.175,50.292 h1.27 r270; Bottom Overlay "2" at 5.715,50.038 h1.27 r270; Bottom Overlay "7" at 3.175,38.481 h1.27 r270; Bottom Overlay "8" at 5.588,38.481 h1.27 r270